# Altium PCB PCB1.pcbdoc
Units mil, origin at the board's own origin, x right, y up, seen from the top; angles counter-clockwise.
Board outline 5810 x 3220 mil, 2 copper layers (Top Layer, Bottom Layer); 108 components, 98 nets, 443 pads, 408 vias.
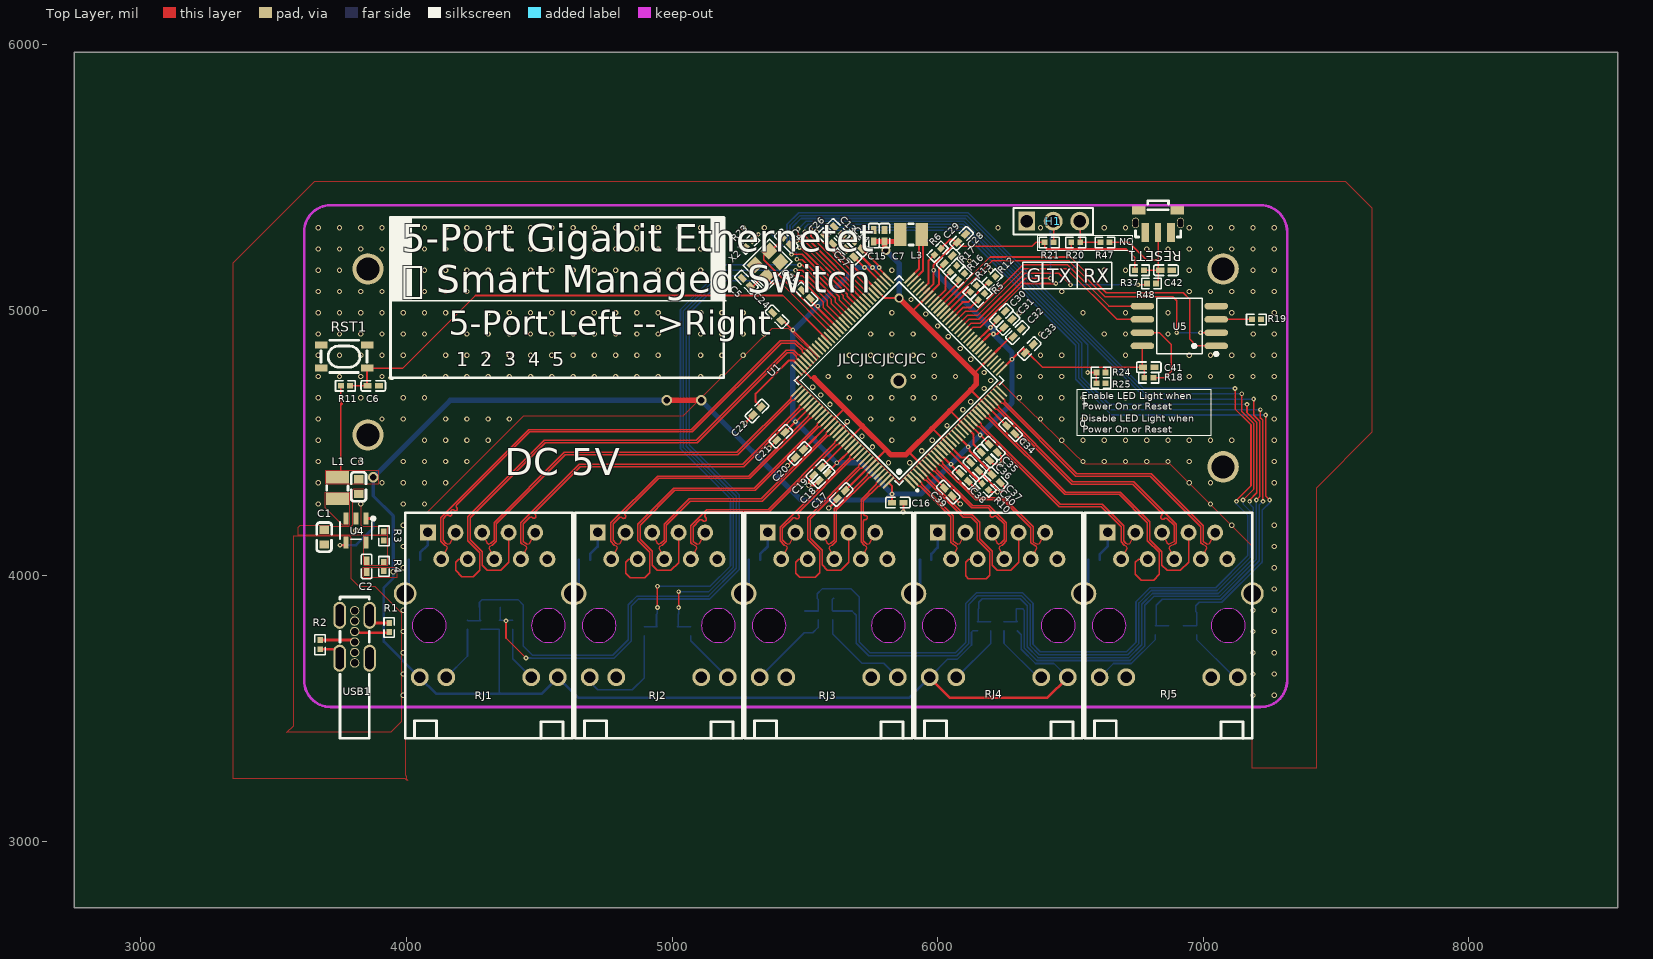
[diagram p0: Top Layer view]
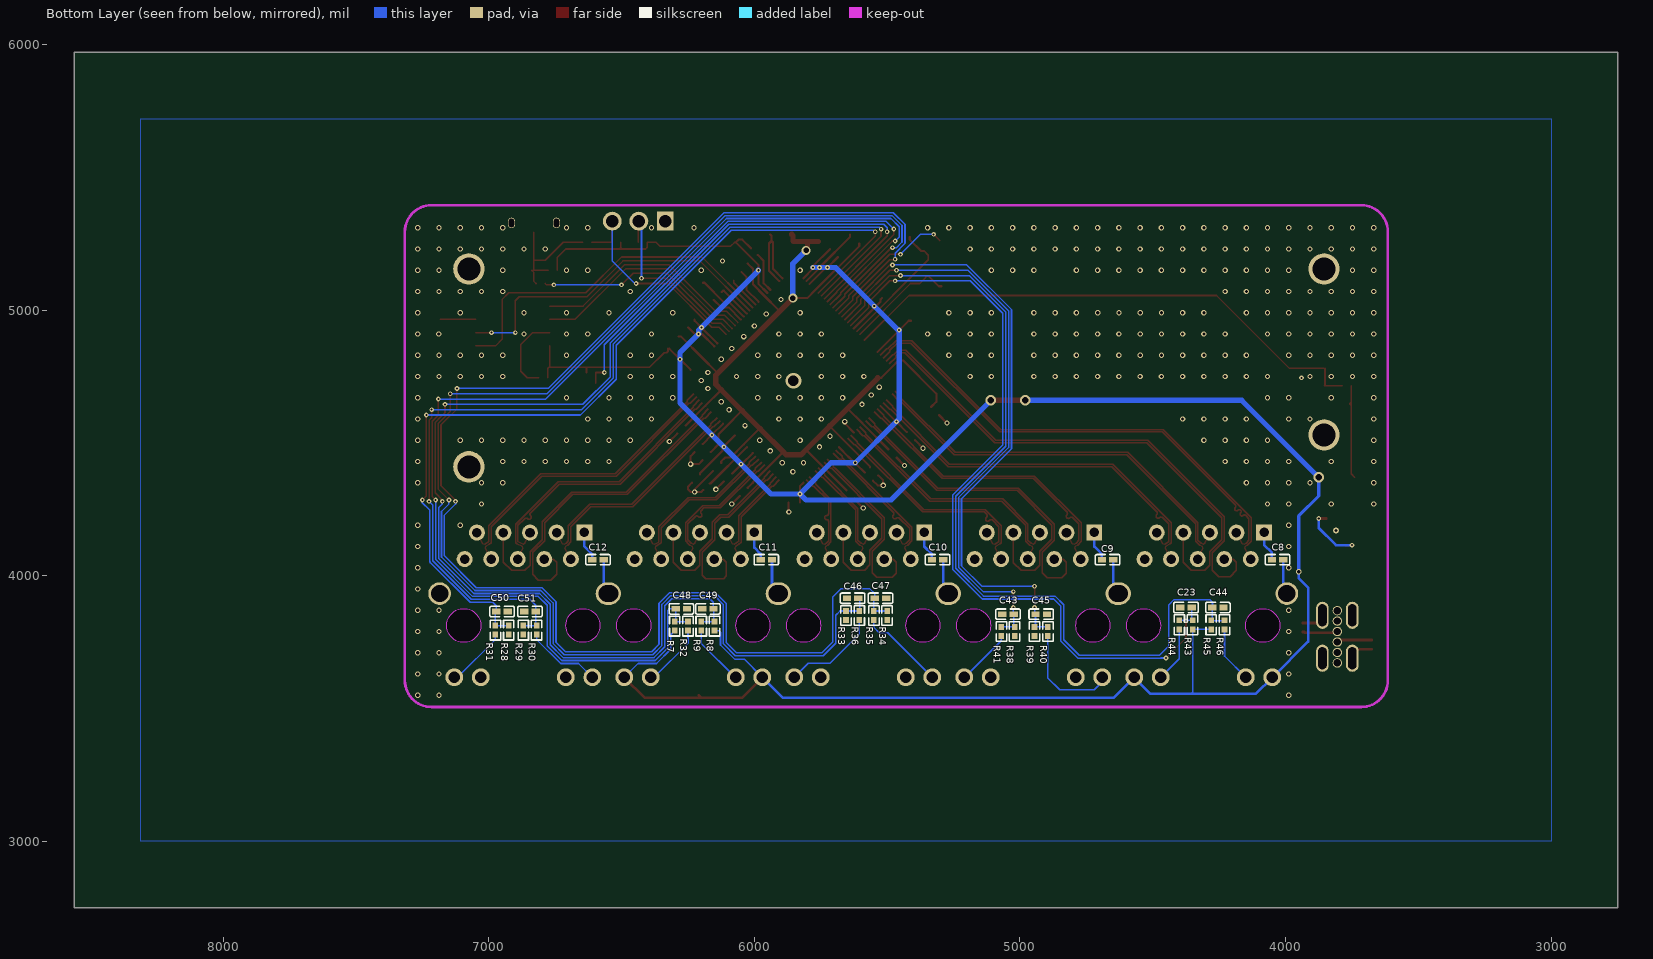
[diagram p1: Bottom Layer view, seen from below]

## Layer stack, top to bottom
Top Layer: signal copper (thickness not stored)
Dielectric: dielectric 12.6, FR-4, Dk 4.8
Bottom Layer: signal copper (thickness not stored)

## Board outline
8560,2750 2750,2750 2750,5970 8560,5970

## Components (designator, comment, footprint, x,y, rotation, side; value= is the part's Value field where it differs from the comment)
C1 "cc0603krx7r9bb104" c0603 3690,4145 r270 top
C2 "fn15x104k250png" c0402 3850,4035 r90 top
C3 "cc0603krx7r9bb104" c0603 3820,4335 r90 top
C4 "fn15x104k250png" c0402 5430,5260 r315 top
C5 "fn15x104k250png" c0402 5280,5105 r315 top
C6 "fn15x104k250png" c0402 3875,4715 r180 top
C7 "fn15x104k250png" c0402 5800,5280 r90 top
C8 "fn15x104k250png" c0402 4030,4060 r0 bottom
C9 "fn15x104k250png" c0402 4670,4060 r0 bottom
C10 "fn15x104k250png" c0402 5310,4060 r0 bottom
C11 "fn15x104k250png" c0402 5955,4060 r0 bottom
C12 "fn15x104k250png" c0402 6588.5,4060 r0 bottom
C13 "fn15x104k250png" c0402 5625.4,5299.2 r135 top
C14 "fn15x104k250png" c0402 5699.5,5245 r135 top
C15 "fn15x104k250png" c0402 5760,5280 r90 top
C16 "fn15x104k250png" c0402 5850,4275 r0 top
C17 "fn15x104k250png" c0402 5637.2,4305.3 r225 top
C18 "fn15x104k250png" c0402 5568.8,4373.1 r225 top
C19 "fn15x104k250png" c0402 5548.8,4393.1 r225 top
C20 "fn15x104k250png" c0402 5480,4460 r225 top
C21 "fn15x104k250png" c0402 5410,4525 r225 top
C22 "fn15x104k250png" c0402 5320,4620 r45 top
C23 "fn15x104k250png" c0402 4375,3880 r180 bottom
C24 "fn15x104k250png" c0402 5395,4975 r315 top
C25 "fn15x104k250png" c0402 5505,5060 r135 top
C26 "fn15x104k250png" c0402 5590,5265 r135 top
C27 "fn15x104k250png" c0402 5670,5215 r135 top
C28 "fn15x104k250png" c0402 6040,5190 r225 top
C29 "fn15x104k250png" c0402 6090,5270 r225 top
C30 "fn15x104k250png" c0402 6240,4980 r225 top
C31 "fn15x104k250png" c0402 6265,4950 r225 top
C32 "fn15x104k250png" c0402 6300,4915 r225 top
C33 "fn15x104k250png" c0402 6345,4855 r225 top
C34 "fn15x104k250png" c0402 6275,4550 r135 top
C35 "fn15x104k250png" c0402 6210,4480 r135 top
C36 "fn15x104k250png" c0402 6180,4450 r135 top
C37 "fn15x104k250png" c0402 6220,4365 r135 top
C38 "fn15x104k250png" c0402 6100,4370 r135 top
C39 "fn15x104k250png" c0402 6040,4315 r135 top
C40 "fn15x104k250png" c0402 6140,4410 r135 top
C41 "fn15x104k250png" c0402 6795,4785 r180 top
C42 "fn15x104k250png" c0402 6860,5150 r0 top
C43 "fn15x104k250png" c0402 5045,3855 r180 bottom
C44 "fn15x104k250png" c0402 4255,3880 r0 bottom
C45 "fn15x104k250png" c0402 4920,3855 r0 bottom
C46 "fn15x104k250png" c0402 5630,3915 r180 bottom
C47 "fn15x104k250png" c0402 5525,3915 r0 bottom
C48 "fn15x104k250png" c0402 6275,3875 r0 bottom
C49 "fn15x104k250png" c0402 6175,3875 r180 bottom
C50 "fn15x104k250png" c0402 6950,3865 r0 bottom
C51 "fn15x104k250png" c0402 6845,3865 r180 bottom
H1 "2.54-1*3p针" hdr-th_3p-p2.54-v-m-1 6435,5335 r0 top
L1 "252012cdmcdds-2r2mc" ind-smd_l2.5-w2.0 3740,4330 r270 top
L3 "hpi252010-2r2m" ind-smd_l2.5-w2.0 5900,5285 r0 top
R1 "tr0402d10k0q1025z" r0402 3935,3805 r270 top
R2 "tr0402d10k0q1025z" r0402 3675,3740 r90 top
R3 "tr0402d10k0q1025z" r0402 3915,4150 r90 top
R4 "tr0402d10k0q1025z" r0402 3915,4035 r90 top
R5 "tr0402d10k0q1025z" r0402 6165,5050 r225 top
R6 "tr0402d10k0q1025z" r0402 6000,5220 r225 top
R7 "tr0402d10k0q1025z" r0402 6300,3810 r270 bottom
R8 "tr0402d10k0q1025z" r0402 6150,3810 r270 bottom
R9 "tr0402d10k0q1025z" r0402 6200,3810 r270 bottom
R10 "tr0402d10k0q1025z" r0402 6180,4335 r135 top
R11 "tr0402d10k0q1025z" r0402 3770,4715 r180 top
R12 "tr0402d10k0q1025z" r0402 6205,5115 r225 top
R13 "tr0402d10k0q1025z" r0402 6135,5080 r225 top
R16 "tr0402d10k0q1025z" r0402 6090,5125 r225 top
R17 "tr0402d10k0q1025z" r0402 6060,5155 r225 top
R18 "tr0402d10k0q1025z" r0402 6795,4745 r180 top
R19 "tr0402d10k0q1025z" r0402 7200,4965 r180 top
R20 "tr0402d10k0q1025z" r0402 6520,5255 r0 top
R21 "tr0402d10k0q1025z" r0402 6420,5255 r180 top
R23 "tr0402d10k0q1025z" r0402 5290,5250 r225 top
R24 "tr0402d10k0q1025z" r0402 6615,4765 r0 top
R25 "tr0402d10k0q1025z" r0402 6615,4725 r0 top
R28 "tr0402d10k0q1025z" r0402 6925,3795 r270 bottom
R29 "tr0402d10k0q1025z" r0402 6870,3795 r270 bottom
R30 "tr0402d10k0q1025z" r0402 6820,3795 r270 bottom
R31 "tr0402d10k0q1025z" r0402 6975,3795 r90 bottom
R32 "tr0402d10k0q1025z" r0402 6250,3810 r90 bottom
R33 "tr0402d10k0q1025z" r0402 5655,3850 r270 bottom
R34 "tr0402d10k0q1025z" r0402 5500,3850 r270 bottom
R35 "tr0402d10k0q1025z" r0402 5550,3850 r270 bottom
R36 "tr0402d10k0q1025z" r0402 5605,3850 r90 bottom
R37 "tr0402d10k0q1025z" r0402 6760,5150 r0 top
R38 "tr0402d10k0q1025z" r0402 5020,3790 r270 bottom
R39 "tr0402d10k0q1025z" r0402 4945,3790 r270 bottom
R40 "tr0402d10k0q1025z" r0402 4895,3790 r270 bottom
R41 "tr0402d10k0q1025z" r0402 5070,3790 r90 bottom
R43 "tr0402d10k0q1025z" r0402 4350,3815 r270 bottom
R44 "tr0402d10k0q1025z" r0402 4400,3815 r90 bottom
R45 "tr0402d10k0q1025z" r0402 4280,3815 r270 bottom
R46 "tr0402d10k0q1025z" r0402 4230,3815 r270 bottom
R47 "tr0402d10k0q1025z" r0402 6630,5255 r180 top
R48 "tr0402d10k0q1025z" r0402 6805,5100 r0 top
RESET1 "st-1133" key-smd_st-1133 6830,5335 r180 top
RJ1 "hr911130a" rj45-th_hr911130a 4310,3890 r180 top
RJ2 "hr911130a" rj45-th_hr911130a 4950,3890 r180 top
RJ3 "hr911130a" rj45-th_hr911130a 5590,3890 r180 top
RJ4 "hr911130a" rj45-th_hr911130a 6230,3890 r180 top
RJ5 "hr911130a" rj45-th_hr911130a 6870,3890 r180 top
RST1 "k2-1808sn-a4sw-01" key-smd_4p-l4.2-w3.2-p2.20-ls5.1-tl 3765,4825 r180 top
U1 "rtl8367s-cg" lqfp-128_l14.0-w14.0-p0.40-ls16.0-bl 5855,4735 r45 top
U4 "sy8088iaac" sot-23-5_l3.0-w1.7-p0.95-ls2.8-bl 3810,4170 r180 top
U5 "w25q32jvssiq" soic-8_l5.3-w5.3-p1.27-ls8.0-bl 6910,4940 r90 top
USB1 "13" usb-type-c-th_918-518k2023d5000x 3805,3770 r0 top
X2 "7e25000e20ucg" crystal-smd_4p-l2.5-w2.0-bl 5360,5175 r45 top

## Footprints (in the part's own frame and the unit in brackets; to place one, negate y for a bottom-side part, rotate by r counter-clockwise, add the part's x,y. Pads: shape width x height; smd on the part's side, far side on the other; paste and mask are expansions set on the pad)
c0402 [mm]
  rect 0.79x0.54 smd: 1(-0.545,0) 2(0.545,0)
  silkscreen extent -1.17,-0.5 1.17,0.5
c0603 [mm]
  rect 0.8x0.9 smd: 1(-0.7,0) 2(0.7,0)
  silkscreen extent -1.41,-0.71 1.39,0.72
crystal-smd_4p-l2.5-w2.0-bl [mil]
  rect 47.2x43.3 smd: 1(-37.4,-29.5) 2(37.4,-29.5) 3(37.4,29.5) 4(-37.4,29.5)
  silkscreen extent -79,-69 70,60
hdr-th_3p-p2.54-v-m-1 [mil]
  rect 62x70.9 hole 47.2: 1(-100,0)
  round 70.9 hole 47.2: 2(0,0) 3(100,0)
  silkscreen extent -150,-50 150,50
ind-smd_l2.5-w2.0 [mil]
  rect 47.2x86.6 smd: 1(40.5,0) 2(-40.5,0)
  silkscreen extent -8,-40 8,40
key-smd_4p-l4.2-w3.2-p2.20-ls5.1-tl [mil]
  rect 47.2x25.6 smd: 1(-86.6,43.3) 2(86.6,43.3) 3(-86.6,-43.3) 4(86.6,-43.3)
  silkscreen extent -87,-61 87,60
key-smd_st-1133 [mil]
  oval 27.6x39.4 hole 19.7 slot 31.5 at 90 deg: 1(-84.6,6.9) 3(84.7,6.9)
  rect 51.2x35.4 smd: 1(-72.8,-42.3) 3(72.8,-42.3)
  rect 29.5x70.9 smd: 1(-48.2,42.3) 3(48.2,42.3)
  rect 23.6x70.9 smd: 2(0,42.3)
  silkscreen extent -85,-77 85,60
lqfp-128_l14.0-w14.0-p0.40-ls16.0-bl [mil]
  rect 7.9x57.5 smd: 1(-244.1,-300.4) 2(-228.3,-300.4) 3(-212.6,-300.4) 4(-196.8,-300.4) 5(-181.1,-300.4) 6(-165.3,-300.4) 7(-149.6,-300.4) 8(-133.9,-300.4) 9(-118.1,-300.4) 10(-102.4,-300.4) 11(-86.6,-300.4) 12(-70.9,-300.4) 13(-55.1,-300.4) 14(-39.4,-300.4) 15(-23.6,-300.4) 16(-7.9,-300.4) 17(7.9,-300.4) 18(23.6,-300.4) 19(39.4,-300.4) 20(55.1,-300.4) 21(70.9,-300.4) 22(86.6,-300.4) 23(102.4,-300.4) 24(118.1,-300.4) 25(133.9,-300.4) 26(149.6,-300.4) 27(165.4,-300.4) 28(181.1,-300.4) 29(196.9,-300.4) 30(212.6,-300.4) 31(228.4,-300.4) 32(244.1,-300.4) 65(244.1,300.4) 66(228.4,300.4) 67(212.6,300.4) 68(196.9,300.4) 69(181.1,300.4) 70(165.4,300.4) 71(149.6,300.4) 72(133.9,300.4) 73(118.1,300.4) 74(102.4,300.4) 75(86.6,300.4) 76(70.9,300.4) 77(55.1,300.4) 78(39.4,300.4) 79(23.6,300.4) 80(7.9,300.4) 81(-7.9,300.4) 82(-23.6,300.4) 83(-39.4,300.4) 84(-55.1,300.4) 85(-70.9,300.4) 86(-86.6,300.4) 87(-102.4,300.4) 88(-118.1,300.4) 89(-133.9,300.4) 90(-149.6,300.4) 91(-165.3,300.4) 92(-181.1,300.4) 93(-196.8,300.4) 94(-212.6,300.4) 95(-228.3,300.4) 96(-244.1,300.4)
  rect 57.5x7.9 smd: 33(300.4,-244.1) 34(300.4,-228.3) 35(300.4,-212.6) 36(300.4,-196.8) 37(300.4,-181.1) 38(300.4,-165.3) 39(300.4,-149.6) 40(300.4,-133.9) 41(300.4,-118.1) 42(300.4,-102.4) 43(300.4,-86.6) 44(300.4,-70.9) 45(300.4,-55.1) 46(300.4,-39.4) 47(300.4,-23.6) 48(300.4,-7.9) 49(300.4,7.9) 50(300.4,23.6) 51(300.4,39.4) 52(300.4,55.1) 53(300.4,70.9) 54(300.4,86.6) 55(300.4,102.4) 56(300.4,118.1) 57(300.4,133.9) 58(300.4,149.6) 59(300.4,165.4) 60(300.4,181.1) 61(300.4,196.9) 62(300.4,212.6) 63(300.4,228.4) 64(300.4,244.1) 97(-300.4,244.1) 98(-300.4,228.4) 99(-300.4,212.6) 100(-300.4,196.9) 101(-300.4,181.1) 102(-300.4,165.4) 103(-300.4,149.6) 104(-300.4,133.9) 105(-300.4,118.1) 106(-300.4,102.4) 107(-300.4,86.6) 108(-300.4,70.9) 109(-300.4,55.1) 110(-300.4,39.4) 111(-300.4,23.6) 112(-300.4,7.9) 113(-300.4,-7.9) 114(-300.4,-23.6) 115(-300.4,-39.4) 116(-300.4,-55.1) 117(-300.4,-70.9) 118(-300.4,-86.6) 119(-300.4,-102.4) 120(-300.4,-118.1) 121(-300.4,-133.9) 122(-300.4,-149.6) 123(-300.4,-165.3) 124(-300.4,-181.1) 125(-300.4,-196.8) 126(-300.4,-212.6) 127(-300.4,-228.3) 128(-300.4,-244.1)
  silkscreen extent -279,-345 279,279
r0402 [mm]
  rect 0.566x0.54 smd: 1(-0.433,0) 2(0.433,0)
  silkscreen extent -0.94,-0.5 0.94,0.5
rj45-th_hr911130a [mil]
  round 66.93 hole 43.31: 11(260,272.62) 12(160,272.62) 13(-160,272.62) 14(-260,272.62)
  rect 60x60 hole 35.83: P1(229.63,-272.62)
  round 60 hole 35.83: P2(179.1,-172.38) P3(125.2,-272.38) P4(79.1,-172.38) P5(25.2,-272.38) P6(-20.9,-172.38) P7(-74.8,-272.38) P8(-120.9,-172.38) P9(-174.8,-272.38) P10(-220.9,-172.38)
  round 85 hole 65: SHIELD0(-315,-42.48) SHIELD1(315,-42.48)
  Multi-Layer board cut-out: -288.38,77.62 -282.04,49.86 -264.29,27.6 -238.63,15.25 -210.16,15.25 -184.51,27.6 -166.76,49.86 -160.42,77.62 -160.42,77.62 -166.76,105.38 -184.51,127.64 -210.16,139.99 -238.63,139.99 -264.29,127.64 -282.04,105.38 -288.38,77.62
  Multi-Layer board cut-out: 160.42,77.62 166.76,49.86 184.51,27.6 210.17,15.25 238.64,15.25 264.29,27.6 282.04,49.86 288.38,77.62 288.38,77.62 282.04,105.38 264.29,127.64 238.64,139.99 210.17,139.99 184.51,127.64 166.76,105.38 160.42,77.62
  Multi-Layer keep-out region: -288.38,77.62 -282.04,49.86 -264.29,27.6 -238.63,15.25 -210.16,15.25 -184.51,27.6 -166.76,49.86 -160.42,77.62 -160.42,77.62 -166.76,105.38 -184.51,127.64 -210.16,139.99 -238.63,139.99 -264.29,127.64 -282.04,105.38 -288.38,77.62
  Multi-Layer keep-out region: 160.42,77.62 166.76,49.86 184.51,27.6 210.17,15.25 238.64,15.25 264.29,27.6 282.04,49.86 288.38,77.62 288.38,77.62 282.04,105.38 264.29,127.64 238.64,139.99 210.17,139.99 184.51,127.64 166.76,105.38 160.42,77.62
  silkscreen extent -315,-347 315,503
soic-8_l5.3-w5.3-p1.27-ls8.0-bl [mm]
  oval 0.63x2.25 smd: 1(-1.905,-3.53) 2(-0.635,-3.53) 3(0.635,-3.53) 4(1.905,-3.53) 5(1.905,3.53) 6(0.635,3.53) 7(-0.635,3.53) 8(-1.905,3.53)
  silkscreen extent -2.82,-3.68 2.64,2.18
sot-23-5_l3.0-w1.7-p0.95-ls2.8-bl [mm]
  rect 0.49x1.157 smd: 1(-0.95,-1.154) 2(0,-1.154) 3(0.95,-1.154)
  rect 0.49x1.175 smd: 4(0.95,1.154) 5(-0.95,1.154)
  silkscreen extent -1.8,-1.29 1.53,0.85
usb-type-c-th_918-518k2023d5000x [mil]
  oval 47.2x102.4 hole 31.5 slot 82.7 at 90 deg: 7(-56.3,-80.7) 7(-56.3,80.7) 7(56.3,-80.7) 7(56.3,80.7)
  round 35.4 hole 27.6: A5(0,-19.7) A9(0,59.1) A12(0,98.4) B5(0,19.7) B9(0,-59.1) B12(0,-98.4)
  silkscreen extent -55,-382 55,150

## Free pads (board coordinates)
  round 118.11 hole 86.61: 1(7075,5155) 2(3855,5155) 3(3855,4530) 4(7075,4410)

## Via types
v1: diameter 20, hole 12, Top Layer to Bottom Layer, 345 vias
v2: diameter 17.7, hole 7.9, Top Layer to Bottom Layer, 56 vias
v3: diameter 40, hole 24, Top Layer to Bottom Layer, 3 vias
v4: diameter 34, hole 20, Top Layer to Bottom Layer, 2 vias
v5: diameter 60, hole 40, Top Layer to Bottom Layer, 1 vias
v6: diameter 24.02, hole 12.01, Top Layer to Bottom Layer, 1 vias

## Nets (pads, with @x,y where several pads share a name; then routed paths per layer and width w, separated by ;. In a path a pad name is that pad's centre, name@x,y a point inside that pad or via, vN(x,y) a via of type N, cw(c..) or ccw(c..) an arc to the next point about the centre after c; other vN are vias at no path point)
1V1: C7.1 C15.1 C17.1 C19.1 C20.1 C22.2 C26.1 C28.2 C32.2 C34.2 C36.2 C39.2 C40.2 L3.2 U1.6 U1.14 U1.20 U1.27 U1.37 U1.58 U1.69 U1.95 U1.108 U1.114 U1.122 | length 4193.5
  Top Layer w7.9: C22.2 5334.8,4635.2 5315,4655 5315,4685 5440,4810 5457.14,4810 U1.95 5522.14,4745 5535,4745 ; C20.1 5592.45,4572.45 U1.108 5649.85,4630.12 ; C19.1 5564,4410.63 U1.114 5715.82,4562.44 5715.82,4564.18 ; C26.1 5605.2,5240.91 U1.69 5801.11,5045 v4@5845,5045 ; C17.1 5748.37,4416.47 U1.122 5805.67,4474.1 5805.9,4474.1 ; 5890.8,4465.8 5890.8,4465.43 U1.6 6005,4351.23 6005,4350 6006.23,4350 6024.8,4331.43 C39.2 ; 5910.09,5001.65 U1.58 6005,5096.57 6005,5155 C28.2 ; 5978.3,4553.3 5980.98,4553.3 U1.14 6089.28,4445 6110,4445 6124.8,4430.2 C40.2 ; 6045.86,4620.86 6047.06,4620.86 U1.20 6135,4532.92 6135,4495 C36.2 ; 6125.03,4700.03 6125.03,4698.88 U1.27 6258.71,4565.2 C34.2 ; 6143.47,4767.35 U1.37 6275.91,4899.8 C32.2
  Top Layer w20: 5535,4745 5715.82,4564.18 5805.9,4474.1 5825,4455 5880,4455 5890.8,4465.8 5978.3,4553.3 6045.86,4620.86 6125.03,4700.03 6145,4720 6145,4755 v4(5855,5045) ; C15.1 C7.1 ; v4(5805,5225) 5800,5230 C7.1 ; L3.2 5854.5,5280 5854.5,5260 5853,5258.5 C7.1
  Bottom Layer w20: v4(5805,5225) 5855,5175 v4(5855,5045)
3V3: C2.1 C3.2 C13.1 C14.1 C16.1 C18.1 C21.1 C24.2 C25.1 C27.1 C29.2 C30.2 C31.2 C33.2 C35.2 C37.2 C38.2 C41.2 L1.2 R4.1 R6.1 R7.2 R8.2 R11.2 R18.2 R20.1 R21.2 R24.2 R37.1 R43.2 R45.2 RJ1.11 RJ1.14 RJ4.11 RJ4.14 U1.11 U1.17 U1.21 U1.33 U1.41 U1.42 U1.59 U1.65 U1.66 U1.67 U1.82 U1.90 U1.102 U1.116 U1.128 U5.8 | length 13324.9
  Top Layer w6: L1.2 3752.96,4383.46 3752.96,4641.15 ; R11.2 3752.96,4653.19 ; C29.2@6075.2,5254.8 6090,5240 6355,5240 6370,5255 R21.2 6402.96,5237.04 6410,5230 6497.23,5230 ; C33.2 6339.77,4839.83 6394.59,4785 6627.04,4785 ; R20.1 6502.96,5235.73 ; R24.2 6632.04,4780 ; R37.1 6742.96,5197.04 6710,5230 6508.69,5230 ; U5.8 6771,4787.5 C41.2 ; R18.2 6777.96,4780.54 C41.2 ; 3752.96,4641.15 3758.98,4647.17 ; 3752.96,4641.15 3752.96,4647.17 ; 3752.96,4647.17 3758.98,4647.17 ; 3752.96,4647.17 3752.96,4653.19 ; 3752.96,4653.19 3758.98,4647.17 ; 6497.23,5230 6502.96,5235.73 ; 6497.23,5230 6502.96,5230 ; 6502.96,5230 6502.96,5235.73 ; 6502.96,5230 6508.69,5230 ; 6502.96,5235.73 6508.69,5230 ; 6627.04,4785 6632.04,4780 ; 6627.04,4785 6632.04,4785 ; 6632.04,4780 6632.04,4785 ; 6632.04,4780 6637.04,4785 ; 6632.04,4785 6637.04,4785 ; 6637.04,4785 C41.2
  Top Layer w7.9: C24.2 5418.64,4959.8 v2@5455,4923.43 ; C21.1 5426.29,4540.2 5465,4578.91 v2(5465,4580) 5466.09,4580 U1.102 ; v2(5455,4925) v2@5455,4923.43 ; C25.1 5525.2,5039.8 5525.2,5031.42 U1.82 ; U1.90 v2@5455,4923.43 ; C18.1 5646.11,4448.19 ; v2(5620,4425) 5622.92,4425 5645,4447.08 ; C13.1 5640.2,5283.6 5640.2,5274.8 v2@5749,5166 ; 5645,4445.03 5645,4447.08 ; U1.116 5646.11,4448.19 ; C27.1 v2(5725,5160) 5730.66,5160 U1.67 ; v2@5750,5163.01 U1.66 ; U1.128 5828.5,4336.67 v2(5828.5,4307.69) C16.1 ; U1.65 5780,5155.21 5780,5164.5 C14.1@5715,5229.5 ; U1.59 5985,5098.91 v2(5985,5150) 5985,5170 C29.2@6069.8,5254.8 ; U1.11 v2@6045,4422.53 ; R6.1 6045,5265 6060,5265 6069.8,5255.2 C29.2@6069.8,5254.8 ; U1.17 6120,4481.17 6120,4470 6204.8,4385.2 C37.2 ; C29.2@6075.2,5254.8 C29.2@6069.8,5254.8 ; C38.2 6082.33,4385.2 v2@6048.76,4418.76 ; U1.21 v2(6160,4530) ; U1.42 v2(6199.36,4934.54) 6224.8,4959.98 C30.2 ; U1.41 6197.02,4910 v2(6210,4910) 6225,4910 C31.2 ; v2@6160,4530.27 v2(6160,4530) ; C35.2 6194.8,4495.47 6160.27,4530 v2(6160,4530) ; U1.33 6280,4814.79 v2(6280,4815) 6280.21,4815 6320.01,4854.8 ; 6324.8,4854.8 6324.8,4844.85 C33.2 ; 5645,4447.08 5646.11,4448.19 ; C14.1 5714.7,5229.6 5714.8,5229.5 C14.1@5715,5229.5 ; C14.1 5715.2,5229.5 C14.1@5715,5229.5 ; C14.1 C14.1@5715,5229.5 ; v2@5749,5166 v2@5753.01,5160 ; v2@5749,5166 v2@5751,5164 ; v2@5751,5164 v2@5753.01,5160 ; v2@5751,5164 v2(5755,5160) v2@5753.01,5160 ; v2@6045,4422.53 6047.47,4422.53 v2@6048.76,4418.76 ; v2@6045,4422.53 v2@6048.76,4418.76
  Top Layer w10: RJ4.11 6047.38,3540 6200,3540 ; 6210,3550 6200,3540 ; RJ4.14 6412.62,3540 6200,3540
  Top Layer w20: v3(4980,4660) v3(5110,4660)
  Bottom Layer w6: R45.2 R43.2 4350,3560.94 ; 4344.06,3555 4350,3560.94 ; 4350.12,3555 4350,3555.12 4350,3560.94 ; 4355.94,3555 4350,3560.94 ; RJ4.11 6038.62,3686 6074.44,3686 6127.52,3739.09 6127.52,3787.52 6132.96,3792.96 R8.2 ; R7.2 6314.96,3778 6314.96,3723.06 6368.56,3669.46 6437.92,3669.46 RJ4.14
  Bottom Layer w10: v1(3950,4015) 3950,3990 3915,3955 3915,3752.38 RJ1.11 4112.38,3555 4344.06,3555 4350.12,3555 4355.94,3555 4507.62,3555 RJ1.14 4647.38,3540 5892.62,3540 RJ4.11
  Bottom Layer w12: v3(3875,4370) 3875,4300 3950,4225 v1(3950,4015)
  Bottom Layer w20: v3(3875,4370) 4165,4660 v3(4980,4660) ; v3(5110,4660) 5485,4285 5805.81,4285 v2(5828.5,4307.69) ; v2(5780,5160) v2(5755,5160) v2(5725,5160) 5694.1,5160 v2(5548.8,5014.7) 5459.1,4925 v2(5455,4925) 5455,4590 v2(5465,4580) v2(5620,4425) 5711.19,4425 v2(5828.5,4307.69) ; v2(5985,5150) 5985,5148.9 v2(6199.36,4934.54) 6210,4923.9 v2(6210,4910) 6280,4840 v2(6280,4815) 6280,4650 v2(6160,4530) v2(6115,4485) v2(6050,4420) 5937.69,4307.69 v2(5828.5,4307.69)
$1N5419: L1.1 U4.3
$1N5420: C2.2 R3.1 R4.2 U4.5
$1N8196: R1.2 USB1.B5 | length 133.2
  Top Layer w10: USB1.B5 3815.3,3789.7 3820,3785 3927.04,3785 3930,3787.96 R1.2
$1N8209: R2.2 USB1.A5 | length 133.6
  Top Layer w10: R2.2 3675.92,3757.96 3797.34,3757.96 USB1.A5
$1N10548: R5.2 U1.50 | length 132.8
  Top Layer w7.9: U1.50 6096.62,5010 6125,5010 R5.2
$1N11208: R6.2 U1.60 | length 152.6
  Top Layer w7.9: U1.60 5965,5101.11 5965,5185 R6.2
$1N14909: R10.2 U1.13 | length 196.1
  Top Layer w7.9: U1.13 6165.03,4347.05 R10.2
$1N15365: C6.2 R11.1 RST1.1 U1.86 | length 2046.8
  Top Layer w6: R11.1 C6.2 3851.6,4716.9 RST1.1 ; RST1.1@3856.6,4781.7 3986.7,4781.7 4260,5055 5417.53,5055 U1.86@5586.35,4886.18
$1N15851: L3.1 U1.63 U1.64 | length 355.1
  Top Layer w7.9: U1.64 5930,5155.21 5930,5254.5 L3.1@5935.5,5260 ; U1.63 5945,5148.01 5945,5250.5 L3.1@5935.5,5260 ; L3.1 5935.5,5280 L3.1@5935.5,5260
$1N16314: C8.2 RJ1.P1 | length 114.6
  Bottom Layer w10: C8.2 4051.5,4086.5 4080.37,4115.37 RJ1.P1
$1N16437: C9.2 RJ2.P1 | length 114.6
  Bottom Layer w10: C9.2 4691.5,4081.5 4720,4110 4720,4162.25 RJ2.P1
$1N16560: C10.2 RJ3.P1 | length 114.6
  Bottom Layer w10: C10.2 5331.5,4081.5 5360.37,4110.37 RJ3.P1
$1N16683: C11.2 RJ4.P1 | length 112.5
  Bottom Layer w10: C11.2 5976.5,4081.5 6000.37,4105.37 RJ4.P1
$1N16806: C12.2 RJ5.P1 | length 115.2
  Bottom Layer w10: C12.2 6610,4080 6640.37,4110.37 RJ5.P1
$1N31077: R12.2 U1.51 | length 206.3
  Top Layer w7.9: U1.51 6094.28,5030 6115,5030 6187.95,5102.95 R12.2
$1N31108: R13.2 U1.52 | length 129.5
  Top Layer w7.9: U1.52 R13.2@6115.03,5072.95 ; R13.2@6117.95,5072.95 R13.2
$1N31201: R16.2 U1.55 | length 127.5
  Top Layer w6: U1.55 6077.95,5102.77 R16.2
$1N31232: R17.2 U1.56 | length 138.6
  Top Layer w7.9: U1.56 6030,5077.02 6030,5125 R17.2
$1N32914: R18.1 U5.7 | length 306
  Top Layer w6: U5.7 6835,4915 6880,4870 6880,4770 6855,4745 R18.1
$1N34449: R19.2 U5.3 | length 134
  Top Layer w6: U5.3 R19.2
$1N57246: R46.2 RJ1.12 | length 213.7
  Bottom Layer w6: RJ1.12 4230,3697.38 R46.2
$1N58694: R44.1 RJ1.13 | length 209.6
  Bottom Layer w6: R44.1 4400,3687.38 RJ1.13
$1N64288: R41.1 RJ2.14 | length 215
  Bottom Layer w6: R41.1 5070,3755 5207.62,3617.38 RJ2.14
$1N66730: R40.2 RJ2.11 | length 411.4
  Bottom Layer w6: RJ2.11 4690,3600 4720,3570 4850,3570 4895,3615 R40.2
$1N68404: R35.2 RJ3.11 | length 325.7
  Bottom Layer w6: RJ3.11 5497.62,3785 5530,3785 5550,3805 R35.2
$1N69259: R36.1 RJ3.14 | length 365.3
  Bottom Layer w6: R36.1 5605,3780 5715,3670 5797.38,3670 RJ3.14
$1N70886: R9.2 RJ4.12 | length 230.8
  Bottom Layer w6: RJ4.12 6072.38,3617.38 6200,3745 R9.2
$1N72981: R32.1 RJ4.13 | length 240.8
  Bottom Layer w6: R32.1 6250,3745 6377.62,3617.38 RJ4.13
$1N74126: R30.2 RJ5.11 | length 287
  Bottom Layer w6: RJ5.11 6662.08,3669.46 6729.46,3669.46 6820,3760 R30.2
$1N74128: R31.1 RJ5.14 | length 232
  Bottom Layer w6: R31.1 6975,3760 7117.62,3617.38 RJ5.14
DL: R23.1 U1.76 | length 524.9
  Top Layer w6: R23.1 v2(5325,5285) ; v2(5450,5210) 5490,5210 5645,5055 5645,5045.27 U1.76
  Bottom Layer w6: v2(5325,5285) 5375,5285 v2(5450,5210)
EN_PL: R24.1 R25.1 U1.73 | length 1849.8
  Top Layer w6: v2(5475,5305) 5475,5285 5690,5070 5690,5067.02 U1.73 ; v2(6565,4765) R24.1 R25.1
  Bottom Layer w6: v2(5475,5305) 5503.85,5333.85 6100.58,5333.85 6565,4869.43 v2(6565,4765)
GND: C1.1 C3.1 C4.2 C5.1 C6.1 C7.2 C8.1 C9.1 C10.1 C11.1 C12.1 C13.2 C14.2 C15.2 C16.2 C17.2 C18.2 C19.2 C20.2 C21.2 C22.1 C23.1 C24.1 C25.2 C26.2 C27.2 C28.1 C29.1 C30.1 C31.1 C32.1 C33.1 C34.1 C35.1 C36.1 C37.1 C38.1 C39.1 C40.1 C41.1 C42.2 C43.1 C44.1 C45.1 C46.1 C47.1 C48.1 C49.1 C50.1 C51.1 H1.1 pad.1 pad.2 pad.3 pad.4 R1.1 R2.1 R3.2 R5.1 R10.1 R12.1 R13.1 R16.1 R17.1 R19.1 R23.2 R25.2 R28.2 R29.2 R33.2 R34.2 R38.2 R39.2 RESET1.1 RESET1.3 RJ1.P10 RJ1.SHIELD0 RJ1.SHIELD1 RJ2.12 RJ2.13 RJ2.P10 RJ2.SHIELD0 RJ2.SHIELD1 RJ3.12 RJ3.13 RJ3.P10 RJ3.SHIELD0 RJ3.SHIELD1 RJ4.P10 RJ4.SHIELD0 RJ4.SHIELD1 RJ5.12 RJ5.13 RJ5.P10 RJ5.SHIELD0 RJ5.SHIELD1 RST1.3 U1.1 U1.12 U1.18 U1.24 U1.32 U1.34 U1.40 U1.43 U1.44 U1.57 U1.61 U1.62 U1.68 U1.85 U1.89 U1.96 U1.99 U1.105 U1.111 U1.115 U1.119 U1.125 U4.2 U5.4 USB1.7 USB1.A12 USB1.B12 X2.2 X2.4 | length 1666.9
  Top Layer w7.9: v1(5275,4575) C22.1 ; v1(5365,4480) C21.2 ; v1(5435,4415) C20.2 ; C19.2 5515,4359.3 v1(5515,4340) 5535.7,4340 C18.2 ; v1(5590,4255) 5622,4287 C17.2 ; U1.111 5660,4573.38 v1(5660,4580) ; v1(5870,4240) 5871.5,4241.5 C16.2 ; C39.1 v1(6085,4270) ; C38.1 v1(6145,4325) ; C40.1 6225,4325 v1(6225,4315) ; R10.1 6200,4315 v1(6225,4315) ; C36.1 6210,4420 v1(6240,4420) 6240,4450 C35.1 ; C37.1 6250,4335 6250,4325 6240,4315 v1(6225,4315) ; C34.1 v1(6320,4505)
  Top Layer w10: R2.1 3748.7,3722.96 USB1.7@3748.7,3689.3 ; USB1.7@3861.3,3850.7 3861.3,3822.04 R1.1
  Bottom Layer w10: RJ1.SHIELD1 4008.5,3945.98 C8.1 ; RJ2.SHIELD1 4648.5,3945.98 C9.1 ; RJ3.SHIELD1 5288.5,3945.98 C10.1 ; RJ4.SHIELD1 5933.5,3950.98 C11.1 ; RJ5.SHIELD1 6567,3944.48 C12.1
  other v1: 3987.63,3549.79 7187.63,3549.79 7267.63,3549.79 3987.63,3629.79 7187.63,3629.79 7267.63,3629.79 3987.63,3709.79 7187.63,3709.79 7267.63,3709.79 3987.63,3789.79 7187.63,3789.79 7267.63,3789.79 3987.63,3869.79 7187.63,3869.79 7267.63,3869.79 7267.63,3949.79 3987.63,4029.79 7267.63,4029.79 3987.63,4109.79 7267.63,4109.79 3987.63,4189.79 7107.63,4189.79 7267.63,4189.79 3667.63,4269.79 3827.63,4269.79 3987.63,4269.79 4067.63,4269.79 7027.63,4269.79 3667.63,4349.79 3907.63,4349.79 3987.63,4349.79 4067.63,4349.79 4147.63,4349.79 6947.63,4349.79 7027.63,4349.79 7267.63,4349.79 5855,4391.35 5815,4425 5895,4425 3667.63,4429.79 3827.63,4429.79 3987.63,4429.79 4067.63,4429.79 4147.63,4429.79 4227.63,4429.79 6547.63,4429.79 6627.63,4429.79 6707.63,4429.79 6787.63,4429.79 6867.63,4429.79 6947.63,4429.79 7267.63,4429.79 5940,4470 5755,4485 3667.63,4509.79 4067.63,4509.79 4147.63,4509.79 4227.63,4509.79 4307.63,4509.79 5827.63,4509.79 5980,4510 6467.63,4509.79 6547.63,4509.79 6627.63,4509.79 6707.63,4509.79 6787.63,4509.79 6867.63,4509.79 6947.63,4509.79 7027.63,4509.79 7107.63,4509.79 7267.63,4509.79 5715,4525 6035,4565 3667.63,4589.79 3907.63,4589.79 3987.63,4589.79 4147.63,4589.79 4227.63,4589.79 4307.63,4589.79 4387.63,4589.79 5747.63,4589.79 5827.63,4589.79 5907.63,4589.79 6387.63,4589.79 6467.63,4589.79 6547.63,4589.79 6627.63,4589.79 7267.63,4589.79 6095,4625 5595,4645 6125,4655 3667.63,4669.79 3827.63,4669.79 3987.63,4669.79 4067.63,4669.79 5667.63,4669.79 5747.63,4669.79 5827.63,4669.79 5907.63,4669.79 5987.63,4669.79 6307.63,4669.79 6387.63,4669.79 6467.63,4669.79 6547.63,4669.79 6707.63,4669.79 7267.63,4669.79 5560,4680 6175,4705 5530,4710 6200,4735 3667.63,4749.79 3747.63,4749.79 3827.63,4749.79 3907.63,4749.79 4067.63,4749.79 4147.63,4749.79 4227.63,4749.79 4307.63,4749.79 4387.63,4749.79 4467.63,4749.79 4547.63,4749.79 4627.63,4749.79 4707.63,4749.79 4787.63,4749.79 4867.63,4749.79 4947.63,4749.79 5107.63,4749.79 5187.63,4749.79 5587.63,4749.79 5667.63,4749.79 5747.63,4749.79 5907.63,4749.79 5987.63,4749.79 6067.63,4749.79 6307.63,4749.79 6387.63,4749.79 6467.63,4749.79 6947.63,4749.79 7027.63,4749.79 7107.63,4749.79 7187.63,4749.79 7267.63,4749.79 6175,4765 6125,4815 3667.63,4829.79 3747.63,4829.79 3827.63,4829.79 3907.63,4829.79 3987.63,4829.79 4147.63,4829.79 4227.63,4829.79 4307.63,4829.79 4387.63,4829.79 4467.4,4829.9 4547.4,4829.9 4627.63,4829.79 4707.63,4829.79 4787.63,4829.79 4867.63,4829.79 4947.63,4829.79 5107.63,4829.79 5187.63,4829.79 5267.63,4829.79 5667.63,4829.79 5747.63,4829.79 5827.63,4829.79 5907.63,4829.79 5987.63,4829.79 6387.63,4829.79 6467.63,4829.79 6707.63,4829.79 6947.63,4829.79 7027.63,4829.79 7107.63,4829.79 7187.63,4829.79 7267.63,4829.79 6085,4855 6040,4900 3667.63,4909.79 3747.63,4909.79 3827.63,4909.79 3907.63,4909.79 3987.63,4909.79 4067.63,4909.79 4227.63,4909.79 4307.63,4909.79 4387.63,4909.79 4467.4,4909.9 4547.4,4909.9 4627.63,4909.79 4707.63,4909.79 4787.63,4909.79 4867.63,4909.79 4947.63,4909.79 5107.63,4909.79 5187.63,4909.79 5267.63,4909.79 5347.63,4909.79 5747.63,4909.79 5827.63,4909.79 5907.63,4909.79 6387.63,4909.79 6627.63,4909.79 6707.63,4909.79 6867.63,4909.79 7188.4,4909.8 7267.63,4909.79 6000,4940 5955,4985 3667.63,4989.79 3747.63,4989.79 3827.63,4989.79 3907.63,4989.79 3987.63,4989.79 4067.63,4989.79 4147.63,4989.79 4307.63,4989.79 4387.63,4989.79 4467.4,4989.9 4547.4,4989.9 4627.4,4989.9 4707.4,4989.9 4787.63,4989.79 4867.63,4989.79 4947.63,4989.79 5107.63,4989.79 5187.63,4989.79 5267.63,4989.79 5827.63,4989.79 6307.63,4989.79 6547.63,4989.79 6707.63,4989.79 6867.63,4989.79 7107.63,4989.79 7267.63,4989.79 5900,5040 3667.63,5069.79 3747.63,5069.79 3827.63,5069.79 3907.63,5069.79 3987.63,5069.79 4067.63,5069.79 4147.63,5069.79 4227.63,5069.79 6467.63,5069.79 6947.63,5069.79 7027.63,5069.79 7107.63,5069.79 7187.63,5069.79 7267.63,5069.79 3667.63,5149.79 3747.63,5149.79 3987.63,5149.79 4067.63,5149.79 4147.63,5149.79 4227.63,5149.79 4307.63,5149.79 4387.63,5149.79 4467.5,5150 4547.5,5150 4627.63,5149.79 4707.63,5149.79 4787.63,5149.79 4947.63,5149.79 5027.63,5149.79 5107.63,5149.79 5827.63,5149.79 6200,5150 6627.63,5149.79 6707.63,5149.79 6947.63,5149.79 7187.63,5149.79 7267.63,5149.79 6120,5185 3667.63,5229.79 3747.63,5229.79 3827.63,5229.79 3907.63,5229.79 3987.63,5229.79 4067.63,5229.79 4147.63,5229.79 4227.63,5229.79 4307.63,5229.79 4387.63,5229.79 4467.63,5229.79 4547.63,5229.79 4627.63,5229.79 4707.63,5229.79 4787.63,5229.79 4867.63,5229.79 4947.63,5229.79 5027.63,5229.79 5107.63,5229.79 5187.63,5229.79 6787.63,5229.79 6867.63,5229.79 6947.63,5229.79 7027.63,5229.79 7107.63,5229.79 7187.63,5229.79 7267.63,5229.79 3667.63,5309.79 3747.63,5309.79 3827.63,5309.79 3907.63,5309.79 3987.63,5309.79 4067.63,5309.79 4147.63,5309.79 4227.63,5309.79 4307.63,5309.79 4387.63,5309.79 4467.63,5309.79 4547.63,5309.79 4627.63,5309.79 4707.63,5309.79 4787.63,5309.79 4867.63,5309.79 4947.63,5309.79 5027.63,5309.79 5107.63,5309.79 5187.63,5309.79 5267.63,5309.79 5347.63,5309.79 6227.63,5309.79 6387.63,5309.79 6627.63,5309.79 6707.63,5309.79 6947.63,5309.79 7027.63,5309.79 7107.63,5309.79 7187.63,5309.79 7267.63,5309.79
  other v2: 3940,4745
  other v5: 5853.1,4733.8
  other v6: 3810,4170
P0_LED0: C23.2 R43.1 R44.2 U1.81 | length 3038.7
  Top Layer w6: v2(4375,3830) 4375,3765 v2(4450,3690) ; v2(5470,5110) 5490,5110 5570,5030 5570,5008.83 U1.81
  Bottom Layer w6: C23.2 4353.5,3835.54 R43.1 4372.96,3832.04 v2(4375,3830) 4377.04,3832.04 R44.2 ; v2(4450,3690) 4469.43,3690 4470.44,3688.99 4781.13,3688.99 4846.51,3754.37 4846.51,3885.94 4872.71,3912.14 5142.14,3912.14 5253.03,4023.03 5253.03,4303.68 5065,4491.71 5065,4988.29 5186.71,5110 v2(5470,5110)
P0_LED1: C44.2 R45.1 R46.1 U1.80 | length 3261.5
  Top Layer w6: v2(5450,5130) 5490,5130 5585,5035 5585,5016.17 U1.80
  Bottom Layer w6: R46.1 4231.5,3830.54 R45.1@4276.5,3830.54 ; R45.1 4278.5,3830.54 R45.1@4276.5,3830.54 ; v2(5450,5130) 5191.14,5130 5053.99,4992.85 5053.99,4487.15 5242.02,4299.12 5242.02,4027.59 5137.58,3923.15 4868.15,3923.15 4835.5,3890.5 4835.5,3758.93 4776.56,3700 4475,3700 4440,3735 4440,3890 4420,3910 4285,3910 4275,3900 4275,3881.5 C44.2 R45.1@4276.5,3830.54
P0MDIAN: RJ1.P3 U1.92 | length 1867.5
  Top Layer w5: RJ1.P3 4162.5,4121.01 4155.32,4118.86 4148.71,4122.42 4138.07,4133.07 4138.07,4215 4149.65,4226.58 cw(c4154.6,4221.63) 4159.55,4226.58 ccw(c4164.5,4231.53) 4169.45,4226.58 ccw(c4164.5,4231.53) 4169.45,4236.48 cw(c4174.4,4241.43) 4169.45,4246.38 cw(c4174.4,4241.43) 4179.35,4246.38 ccw(c4184.3,4251.33) 4189.25,4246.38 ccw(c4184.3,4251.33) 4189.25,4256.28 cw(c4194.2,4261.23) 4189.25,4266.18 4464.07,4541 5076,4541 5411,4876 5462.69,4876 5490.87,4847.82 5490.87,4843.01 U1.92
P0MDIAP: RJ1.P2 U1.91 | length 1868
  Top Layer w5: RJ1.P2 4153.2,4103.75 4151.05,4110.94 4143.28,4115.12 4129.07,4129.34 4129.07,4218.73 4460.34,4550 5072.27,4550 5407.27,4885 5466.42,4885 5497.24,4854.18 5502.05,4854.18 U1.91
P0MDIBN: RJ1.P7 U1.94 | length 1959.4
  Top Layer w5: RJ1.P7 4384.8,4049.8 4355,4020 4305,4020 4285,4040 4285,4090 4240,4135 4240,4217.27 4522.73,4500 5095,4500 5434.57,4839.57 5454.57,4839.57 5468.6,4825.55 5468.6,4820.74 U1.94
P0MDIBP: RJ1.P4 U1.93 | length 1959.4
  Top Layer w5: RJ1.P4 4197.38,4062.38 4185,4050 4185,4020 4208.2,3996.8 4251.8,3996.8 4276,4021 4276,4086.27 4231,4131.27 4231,4221 4519,4509 5091.27,4509 5430.85,4848.57 5458.3,4848.57 5474.96,4831.91 5479.77,4831.91 U1.93
P0MDICN: RJ1.P6 U1.98 | length 1494.7
  Top Layer w5: RJ1.P6 4311.95,4103.48 4314.55,4110.51 4322.82,4114.33 4339,4130.51 4339,4196.27 4597.73,4455 5247.26,4455 5452.69,4660.44 5457.43,4660.44 U1.98
P0MDICP: RJ1.P5 U1.97 | length 1491.4
  Top Layer w5: RJ1.P5 4303.75,4121.28 4310.78,4118.69 4317.59,4121.83 4330,4134.23 4330,4200 4594,4464 5243.53,4464 5446.33,4666.8 5446.33,4671.54 U1.97
P0MDIDN: RJ1.P9 U1.101 | length 1422.8
  Top Layer w5: RJ1.P9 4462.5,4121.01 4455.32,4118.86 4439.1,4127.6 4439.1,4195 4462.72,4218.62 cw(c4468.38,4212.97) 4474.03,4218.62 ccw(c4479.69,4224.28) 4485.35,4218.62 ccw(c4479.69,4224.28) 4485.35,4229.94 cw(c4491.01,4235.59) 4485.35,4241.25 4654.1,4410 5269.08,4410 5486.07,4626.99 5490.87,4626.99 U1.101
P0MDIDP: RJ1.P8 U1.100 | length 1422
  Top Layer w5: RJ1.P8 4453.2,4103.75 4451.05,4110.94 4433.67,4120.3 4430.1,4123.87 4430.1,4198.73 4650.37,4419 5265.35,4419 5479.7,4633.35 5479.7,4638.16 U1.100
P1_LED0: C43.2 R38.1 R41.2 U1.79 | length 2238.6
  Top Layer w6: v2(5025,3880) v2(5025,3940) ; v2(5465,5150) 5490,5150 5600,5040 5600,5023.38 U1.79
  Bottom Layer w6: v2(5025,3880) 5025,3856.5 C43.2 5023.5,3810.54 R38.1 R41.2 ; v2(5025,3940) 5138.86,3940 5231.01,4032.15 5231.01,4294.56 5042.98,4482.59 5042.98,4997.41 5195.57,5150 v2(5465,5150)
P1_LED1: C45.2 R39.1 R40.1 U1.78 | length 2352.9
  Top Layer w6: v2(4945,3880) v2(4945,3960) ; v2(5480,5170) 5490,5170 5615,5045 5615,5030.72 U1.78
  Bottom Layer w6: R40.1 R39.1 4941.5,3810.54 C45.2 4945,3858.5 v2(4945,3880) ; v2(4945,3960) 5143.29,3960 5220,4036.71 5220,4290 5031.97,4478.03 5031.97,5001.97 5200,5170 v2(5480,5170)
P1MDIAN: RJ2.P3 U1.104 | length 1102
  Top Layer w5: RJ2.P3 4802.5,4121.01 4795.32,4118.86 4788.71,4122.42 4778.07,4133.07 4778.07,4195 4800.64,4217.58 cw(c4806.3,4211.92) 4811.96,4217.58 ccw(c4817.61,4223.23) 4823.27,4217.58 ccw(c4817.61,4223.23) 4823.27,4228.89 cw(c4828.93,4234.55) 4823.27,4240.21 4949.07,4366 5291.9,4366 5519.51,4593.61 5524.25,4593.61 U1.104
P1MDIAP: RJ2.P2 U1.103 | length 1101.3
  Top Layer w5: RJ2.P2 4793.2,4103.75 4791.05,4110.94 4783.28,4115.12 4769.07,4129.34 4769.07,4198.73 4945.34,4375 5288.17,4375 5513.15,4599.98 5513.15,4604.72 U1.103
P1MDIBN: RJ2.P7 U1.107 | length 1266.9
  Top Layer w5: RJ2.P7 5024.94,4162.24 5024.94,4049.44 4995.14,4019.64 4945.14,4019.64 4925.14,4039.64 4925.14,4092.59 4880,4137.73 4880,4190 5011,4321 5313.72,4321 5552.89,4560.17 5557.7,4560.17 U1.107
P1MDIBP: RJ2.P4 U1.106 | length 1267
  Top Layer w5: RJ2.P4 4870.54,4062.02 4837.52,4062.02 4825.14,4049.64 4825.14,4009.86 4843.4,3991.6 4896.6,3991.6 4916.14,4011.14 4916.14,4088.86 4871,4134 4871,4193.73 5007.27,4330 5309.99,4330 5546.52,4566.53 5546.52,4571.34 U1.106
P1MDICN: RJ2.P6 U1.110 | length 929.3
  Top Layer w5: RJ2.P6 4951.95,4103.48 4954.55,4110.51 4962.82,4114.33 4979,4130.51 4979,4190 5069,4280 5339.54,4280 5586.33,4526.79 5591.07,4526.79 U1.110
P1MDICP: RJ2.P5 U1.109 | length 926
  Top Layer w5: RJ2.P5 4943.75,4121.28 4950.78,4118.69 4957.59,4121.83 4970,4134.23 4970,4193.73 5065.27,4289 5335.81,4289 5579.97,4533.16 5579.97,4537.89 U1.109
P1MDIDN: RJ2.P9 U1.113 | length 859.8
  Top Layer w5: RJ2.P9 5102.5,4121.01 5095.32,4118.86 5079.1,4127.6 5079.1,4185 5103.09,4208.99 cw(c5108.75,4203.34) 5114.41,4208.99 5116.04,4207.36 ccw(c5121.7,4213.01) 5127.36,4207.36 ccw(c5121.7,4213.01) 5127.36,4218.67 5125.72,4220.31 cw(c5131.38,4225.97) 5125.72,4231.62 5134.1,4240 5366.36,4240 5619.71,4493.35 5624.52,4493.35 U1.113
P1MDIDP: RJ2.P8 U1.112 | length 854.5
  Top Layer w5: RJ2.P8 5093.2,4103.75 5091.05,4110.94 5073.67,4120.3 5070.1,4123.87 5070.1,4188.73 5130.37,4249 5362.64,4249 5613.35,4499.71 5613.35,4504.52 U1.112
P2_LED0: C46.2 R33.1 R36.2 U1.75 | length 5444.6
  Top Layer w6: v2(5480,5235) 5485,5235 5660,5060 5660,5052.47 U1.75 ; v2(7145,4685) 7145,4618.33 7190.99,4572.29 7190.99,4325.99 v2(7150,4285)
  Bottom Layer w6: v2(5480,5235) 5465,5235 5444,5256 5444,5318.42 5481.43,5355.85 6109.69,5355.85 6780.54,4685 v2(7145,4685) ; C46.2 5603.5,3910 5603.5,3868.54 R36.2 R33.1 5677.96,3867.04 5693.99,3851.01 5693.99,3745.44 5740.44,3698.99 6071.85,3698.99 6116.51,3743.65 6116.51,3890.94 6149.56,3923.99 6315.44,3923.99 6347.99,3891.44 6347.99,3736.74 6382.24,3702.49 6715.82,3702.49 6757.99,3744.66 6757.99,3897.42 6804.57,3944 7051.79,3944 7178.01,4070.22 7177.99,4242.01 7150,4270 v2(7150,4285)
P2_LED1: C47.2 R34.1 R35.1 U1.77 | length 5669.3
  Top Layer w6: v2(5469.8,5191.4) 5471.2,5190 5490,5190 5630,5050 5630,5037.92 U1.77 ; v2(7120,4705) 7120,4627.77 7170.96,4576.78 ; v2(7125,4280) 7125,4283.83 7179.99,4338.82 7179.99,4567.76 7170.94,4576.75
  Bottom Layer w6: v2(5469.8,5191.4) 5470,5191.6 5470,5214.43 5433,5251.43 5433,5322.97 5476.88,5366.85 6114.25,5366.85 6776.1,4705 v2(7120,4705) ; R34.1 R35.1 5550,3911.5 C47.2 5546.5,3931.5 5565,3950 5675,3950 5705,3920 5705,3750 5745,3710 6067.29,3710 6105.5,3748.21 6105.5,3895.5 6145,3935 6320,3935 6359,3896 6359,3741.31 6386.81,3713.5 6711.27,3713.5 6746.99,3749.22 6746.99,3901.99 6800,3955 7047.22,3955 7167,4074.78 7166.98,4228.02 7125,4270 v2(7125,4280)
P2MDIAN: RJ3.P3 U1.118 | length 546.8
  Top Layer w5: RJ3.P3 5442.5,4121.01 5435.32,4118.86 5428.71,4122.42 5415.57,4135.57 5415.57,4177.83 5454.05,4216.32 cw(c5459.71,4210.66) 5465.36,4216.32 ccw(c5471.02,4221.97) 5476.68,4216.32 ccw(c5471.02,4221.97) 5476.68,4227.63 cw(c5482.33,4233.29) 5476.68,4238.94 5675.43,4437.7 5680.17,4437.7 U1.118
P2MDIAP: RJ3.P2 U1.117 | length 546.1
  Top Layer w5: RJ3.P2 5433.2,4103.75 5431.05,4110.94 5423.28,4115.12 5406.57,4131.84 5406.57,4181.56 5669.07,4444.06 5669.07,4448.8 U1.117
P2MDIBN: RJ3.P7 U1.121 | length 731.7
  Top Layer w5: RJ3.P7 5664.8,4050.14 5635,4020.34 5585,4020.34 5565,4040.34 5565,4095 5520,4140 5520,4215 5703.5,4398.5 5703.5,4398.95 5708.81,4404.25 5713.61,4404.25 U1.121
P2MDIBP: RJ3.P4 U1.120 | length 731.7
  Top Layer w5: RJ3.P4 5510.56,4062.72 5477.38,4062.72 5465,4050.34 5465,4010 5480.6,3994.4 5539.4,3994.4 5556,4011 5556,4091.27 5511,4136.27 5511,4218.73 5694.5,4402.23 5694.5,4402.67 5702.44,4410.61 5702.44,4415.42 U1.120
P2MDICN: RJ3.P6 U1.124 | length 414.4
  Top Layer w5: RJ3.P6 5591.95,4103.48 5594.55,4110.51 5602.82,4114.33 5619,4130.51 5619,4247.69 5742.18,4370.87 5746.99,4370.87 U1.124
P2MDICP: RJ3.P5 U1.123 | length 411.2
  Top Layer w5: RJ3.P5 5583.75,4121.28 5590.78,4118.69 5597.59,4121.83 5610,4134.23 5610,4251.42 5735.82,4377.24 5735.82,4382.05 U1.123
P2MDIDN: RJ3.P9 U1.127 | length 358.6
  Top Layer w5: RJ3.P9 5742.5,4121.01 5735.32,4118.86 5728.71,4122.42 5720.57,4130.57 5720.57,4203.85 cw(c5728.07,4203.85) 5728.07,4211.35 ccw(c5728.07,4218.85) 5735.57,4218.85 ccw(c5728.07,4218.85) 5728.07,4226.35 cw(c5728.07,4233.85) 5720.57,4233.85 5720.57,4282.44 5775.63,4337.5 5780.36,4337.5 U1.127
P2MDIDP: RJ3.P8 U1.126 | length 359
  Top Layer w5: RJ3.P8 5733.2,4103.75 5731.05,4110.94 5723.28,4115.12 5711.57,4126.84 5711.57,4286.17 5769.26,4343.86 5769.26,4348.6 U1.126
P3_LED0: C48.2 R7.1 R32.2 U1.74 | length 4469.5
  Top Layer w6: v2(5470,5260) 5480,5260 5675,5065 5675,5059.82 U1.74 ; v2(7190,4665) 7190,4604.44 7212.99,4581.44 7212.99,4297.99 v2(7200,4285)
  Bottom Layer w6: v2(5470,5260) 5455,5275 5455,5313.86 5485.99,5344.85 6105.14,5344.85 6784.99,4665 v2(7190,4665) ; R32.2 R7.1 6296.5,3830.54 C48.2 6320,3875 6325.97,3869.03 6325.97,3727.62 6373.12,3680.47 6724.91,3680.47 6780,3735.56 6780,3888.29 6813.71,3922 7060.93,3922 7200.03,4061.1 7200.01,4260.56 7199.8,4260.56 v2(7200,4285)
P3_LED1: C49.2 R8.1 R9.1 U1.72 | length 4594.7
  Top Layer w6: v2(5500,5295) 5500,5279.36 U1.72 ; v2(7165,4645) 7165,4613.89 7178.99,4599.9 7201.99,4576.87 7201.99,4311.99 7175,4285 v2(7175,4280)
  Bottom Layer w6: v2(5500,5295) 5500,5309.5 5513.35,5322.85 6096.01,5322.85 6542.02,4876.84 6542.02,4749.11 6646.14,4645 v2(7165,4645) ; R9.1 R8.1 6153.5,3830.54 C49.2 6155,3876.5 6155,3900 6167.98,3912.98 6310.88,3912.98 6336.98,3886.88 6336.98,3732.18 6377.68,3691.48 6720.37,3691.48 6768.99,3740.1 6768.99,3892.85 6809.14,3933 7056.36,3933 7189.02,4065.66 7189,4256 7175,4270 v2(7175,4280)
P3MDIAN: RJ4.P3 U1.3 | length 375.5
  Top Layer w5: U1.3 5940.74,4348.6 5940.74,4343.86 6059,4225.6 6059,4130 6064.09,4124.91 6075.32,4118.86 6082.5,4121.01 RJ4.P3
P3MDIAP: RJ4.P2 U1.2 | length 378.1
  Top Layer w5: U1.2 5929.64,4337.5 5934.37,4337.5 6050,4221.87 6050,4126.27 6058.66,4117.61 6071.05,4110.94 6073.2,4103.75 RJ4.P2
P3MDIBN: RJ4.P7 U1.5 | length 715.7
  Top Layer w5: U1.5 5963.01,4370.87 5963.01,4366.14 6100.15,4229 6131,4229 6159,4201 6159,4138.73 6205,4092.73 6205,4039.98 6225,4019.98 6275,4019.98 6304.8,4049.78 RJ4.P7
P3MDIBP: RJ4.P4 U1.4 | length 715.7
  Top Layer w5: U1.4 5951.91,4359.77 5956.65,4359.77 6096.42,4220 6127.27,4220 6150,4197.27 6150,4135 6196,4089 6196,4001 6184,3989 6116,3989 6105,4000 6105,4049.98 6117.38,4062.36 RJ4.P4
P3MDICN: RJ4.P6 U1.8 | length 536.9
  Top Layer w5: U1.8 5996.39,4404.25 5996.39,4399.51 6131.9,4264 6193.73,4264 6259,4198.73 6259,4131.27 6246.59,4118.87 6246.59,4118.1 6242.82,4114.33 6234.55,4110.51 6231.95,4103.48 RJ4.P6
P3MDICP: RJ4.P5 U1.7 | length 537.1
  Top Layer w5: U1.7 5985.28,4393.15 5990.02,4393.15 6128.17,4255 6190,4255 6199.78,4245.22 cw(c6194.12,4239.56) 6199.78,4233.91 ccw(c6205.44,4228.25) 6199.78,4222.59 ccw(c6205.44,4228.25) 6211.09,4222.59 cw(c6216.75,4216.94) 6222.41,4222.59 6250,4195 6250,4135 6237.59,4122.59 6237.59,4121.83 6230.78,4118.69 6223.75,4121.28 RJ4.P5
P3MDIDN: RJ4.P9 U1.10 | length 606.5
  Top Layer w5: U1.10 6018.66,4426.52 6018.66,4421.79 6146.45,4294 6249.73,4294 6360,4183.73 6360,4127.52 6360.88,4126.64 6375.32,4118.86 6382.5,4121.01 RJ4.P9
P3MDIDP: RJ4.P8 U1.9 | length 609.1
  Top Layer w5: U1.9 6007.56,4415.42 6012.3,4415.42 6142.72,4285 6246,4285 6351,4180 6351,4123.79 6355.45,4119.34 6371.05,4110.94 6373.2,4103.75 RJ4.P8
P4_LED0: C50.2 R28.1 R31.2 U1.70 | length 3391.5
  Top Layer w6: v2(5545,5295) 5545,5278.91 U1.70 ; v2(7235,4605) 7235,4300 v2(7250,4285)
  Bottom Layer w6: v2(5545,5295) 5550.84,5300.84 6086.88,5300.84 6520,4867.72 6520,4739.99 6655,4605 v2(7235,4605) ; R28.1 R31.2 6975,3861.5 C50.2 6971.5,3886.5 6985,3900 7070.07,3900 7217.28,4047.21 7219.47,4048.11 7220.37,4050.3 7222.05,4051.98 7222.05,4054.35 7222.96,4056.54 7222.05,4058.73 7222.03,4247.03 7250,4275 v2(7250,4285)
P4_LED1: C51.2 R29.1 R30.1 U1.71 | length 3563.7
  Top Layer w6: v2(5522.8,5304.9) 5523.15,5305.25 5523.15,5278.42 U1.71 ; v2(7215,4625) 7215,4595 7223.99,4586.01 7223.99,4281.01 v2(7225,4280)
  Bottom Layer w6: v2(5522.8,5304.9) 5529.75,5311.85 6091.44,5311.85 6531.01,4872.28 6531.01,4744.55 6650.58,4625 v2(7215,4625) ; R29.1 R30.1 6823.5,3815.54 C51.2 6823.5,3888.5 6846,3911 7065.5,3911 7211.04,4056.54 7211.02,4265.12 7211,4266 v2(7225,4280)
P4MDIAN: RJ5.P3 U1.23 | length 863.2
  Top Layer w5: U1.23 6163.48,4571.34 6163.48,4566.53 6461.01,4269 6619.73,4269 6700,4188.73 6700,4131.13 6708.71,4122.42 6715.32,4118.86 6722.5,4121.01 RJ5.P3
P4MDIAP: RJ5.P2 U1.22 | length 865.8
  Top Layer w5: U1.22 6152.3,4560.17 6157.11,4560.17 6457.28,4260 6616,4260 6691,4185 6691,4127.4 6703.28,4115.12 6711.05,4110.94 6713.2,4103.75 RJ5.P2
P4MDIBN: RJ5.P7 U1.26 | length 1220
  Top Layer w5: U1.26 6196.85,4604.72 6196.85,4599.98 6481.83,4315 6687.73,4315 6799,4203.73 6799,4136 6844,4091 6844,4040.13 6864,4020.13 6914,4020.13 6944.8,4050.93 RJ5.P7
P4MDIBP: RJ5.P4 U1.25 | length 1220
  Top Layer w5: U1.25 6185.75,4593.61 6190.49,4593.61 6478.1,4306 6684,4306 6790,4200 6790,4132.27 6835,4087.27 6835,4005 6813.3,3983.3 6766.7,3983.3 6744,4006 6744,4050.13 6756.38,4062.51 6790.77,4062.51 RJ5.P4
P4MDICN: RJ5.P6 U1.29 | length 1039.6
  Top Layer w5: U1.29 6230.3,4638.16 6230.3,4633.35 6509.65,4354 6738.73,4354 6899,4193.73 6899,4124.34 6894.26,4119.6 6874.55,4110.51 6871.95,4103.48 RJ5.P6
P4MDICP: RJ5.P5 U1.28 | length 1039.7
  Top Layer w5: U1.28 6219.13,4626.99 6223.93,4626.99 6505.92,4345 6735,4345 6842.59,4237.41 cw(c6836.94,4231.75) 6842.59,4226.09 ccw(c6848.25,4220.44) 6842.59,4214.78 ccw(c6848.25,4220.44) 6853.91,4214.78 cw(c6859.56,4209.12) 6865.22,4214.78 6890,4190 6890,4128.07 6889.03,4127.1 6870.78,4118.69 6863.75,4121.28 RJ5.P5
P4MDIDN: RJ5.P9 U1.31 | length 1111.5
  Top Layer w5: U1.31 6252.57,4660.44 6252.57,4655.63 6524.2,4384 6803.73,4384 7000,4187.73 7000,4128.48 7002.97,4125.51 7015.32,4118.86 7022.5,4121.01 RJ5.P9
P4MDIDP: RJ5.P8 U1.30 | length 1114.1
  Top Layer w5: U1.30 6241.4,4649.26 6246.21,4649.26 6520.47,4375 6800,4375 6991,4184 6991,4124.75 6997.54,4118.22 7011.05,4110.94 7013.2,4103.75 RJ5.P8
RESET: C42.1 R37.2 R47.1 R48.1 R48.2 RESET1.2 U1.47 | length 1273.8
  Top Layer w6: U1.47 6118.38,4965 6155,4965 6329,5139 6456,5139 v2(6500,5095) ; R47.1 6720,5255 6787.51,5187.49 6830,5187.49 ; v2(6755,5095) 6782.96,5095 R48.1 ; R37.2 6830,5150 6830,5187.49 ; R48.2 6830,5107.96 6830,5141.46 C42.1 ; RESET1.2 6830,5187.49
  Bottom Layer w6: v2(6500,5095) 6750,5095 v2(6755,5095)
RXD: H1.3 R20.2 R47.2 U1.45 | length 849.9
  Top Layer w6: U1.45 6132.92,4935 6160,4935 6325,5100 v2(6445,5100) ; H1.3 6537.04,5332.96 R20.2 R47.2
  Bottom Layer w6: v2(6445,5100) 6450,5100 6535,5185 H1.3
SCK: U1.87
SDA: U1.88
SPI_CLK: U1.48 U5.6 | length 865
  Top Layer w6: U1.48 6111.17,4980 6150,4980 6325,5155 6485,5155 6675,4965 U5.6
SPI_CS: U1.54 U5.1 | length 1348.7
  Top Layer w6: U1.54 6197.53,5200 6500,5200 6635,5065 6925,5065 6950,5040 6950,4890 6975,4865 U5.1
SPI_D0: U1.49 U5.5 | length 863.3
  Top Layer w6: U1.49 6103.83,4995 6145,4995 6320,5170 6490,5170 6645,5015 U5.5
SPI_D1: U1.53 U5.2 | length 1291.5
  Top Layer w6: U1.53 6204.73,5185 6495,5185 6630,5050 6885,5050 6900,5035 v2(6900,4915) ; v2(6990,4915) U5.2
  Bottom Layer w6: v2(6900,4915) v2(6990,4915)
TXD: H1.2 R21.1 U1.46 | length 712.7
  Top Layer w6: U1.46 6125.72,4950 6159.44,4950 6329.44,5120 v2(6425,5120) ; H1.2 6437.04,5332.96 R21.1
  Bottom Layer w6: v2(6425,5120) 6425,5325 H1.2
VBUS: C1.2 U4.1 U4.4 USB1.A9 USB1.B9 | length 239.7
  Top Layer w10: v2(3750,4115) 3763,4115 U4.4@3775,4115 ; U4.1 3874.6,4215.4 v2(3875,4215)
  Bottom Layer w10: v2(3750,4115) 3810,4115 3875,4180 v2(3875,4215)
XTALI: C5.2 U1.84 X2.1 | length 417.9
  Top Layer w6: X2.1 5354.41,5122.69 5377.11,5100 5412.08,5100 U1.84
  Top Layer w7.9: C5.2 5305.2,5089.8 5343.1,5127.69 X2.1
XTALO: C4.1 U1.83 X2.3 | length 502.9
  Top Layer w6: X2.3 5360.59,5222.31 5345,5206.72 5345,5189.28 U1.83
  Top Layer w7.9: X2.3 5371.9,5222.31 5414.8,5265.2 C4.1
"": RST1.2 RST1.4 U1.15 U1.16 U1.19 U1.35 U1.36 U1.38 U1.39

## Polygon pours and split planes (outlines as drawn)
GND on Bottom Layer (solid, remove dead copper, pour order 0): 3000,3000 8310,3000 8310,5720 3000,5720
3V3 on Top Layer (solid, remove dead copper, pour order 2): 3835,3995 3965,3995 3965,4030 3835,4030
3V3 on Top Layer (solid, remove dead copper, pour order 6): 3695,4346.03 3895,4346.03 3895,4395 3695,4395
$1N5420 on Top Layer (solid, remove dead copper, pour order 1): 3930,4040 3930,4149.99 3929.99,4150 3837.15,4150 3837.15,4042.15 3840,4040
VBUS on Top Layer (solid, remove dead copper, pour order 3): 3580,4150 3785,4150 3790,4145 3790,3990 3820,3960 3880,3960 3980,3860 3980,3450 3940,3410 3550,3410 3575,3435 3575,4150
GND on Top Layer (solid, remove dead copper, pour order 4): 3590,4155 3930,4155 3930,4185 3925,4185 3835,4185 3830,4190 3830,4269.09 3844.15,4283.24 3844.15,4320.85 3840,4325 3800,4325 3795,4320 3795,4266.9 3795,4265 3795,4190 3790,4185 3721.3,4185 3718.17,4188.14 3598.14,4188.14 3590,4180 3590,4157.14
$1N5419 on Top Layer (solid, remove dead copper, pour order 5): 3695,4315 3785,4315 3785,4190 3760,4190 3695,4255
GND on Top Layer (solid, remove dead copper, pour order 7): 6845,4420 6555,4420 6290,4675 6235,4730 5855,4350 5467.1,4738.2 5550,4820 5440,4930 5375,4930 5160,4720 5040,4600 4440,4600 4075,4235 3995,4235 3995,3250 4000,3245 4000,3235 4005,3230 4000.52,3230 4000.31,3229.79 3994.9,3235.2 3347.63,3235.2 3347.63,5177.63 3655,5485 7535,5485 7635,5385 7635,4540 7425,4330 7425,3275 7185,3275 7185,4110 6875,4420

## Keep-outs
Board Outline Layer:
  lines w10 net "": 3615,3605.39 3615,5295 cw(c3715,5295) 3715,5395 7215.79,5395 cw(c7215.79,5295) 7315.79,5295 7315.79,3605.39 cw(c7215.79,3605.39) 7215.79,3505.39 3715,3505.39 cw(c3715,3605.39) 3615,3605.39

## Silkscreen, mask and mechanical layers (free items; w line width, h text height)
Top Silkscreen Layer:
  region net "": 3940,5035 4020,5035 4020,5350 3940,5350
  region net "": 5145,5035 5200,5035 5200,5350 5145,5350
  lines w3 net "": 6375,5225 6735,5225 6735,5280 6375,5280 6375,5225 ; 6523.41,4529 7030,4529 7030,4700 6523.41,4700 6523.41,4529
  lines w5 net "": 3940,4740 3950,4740 ; 3940,5035 5205,5035
  lines w6 net "": 6395,5080 6395,5180 ; 6525,5080 6525,5180 ; 6320,5080 6655,5080 6655,5180 6320,5180 6320,5080
  lines w10 net "": 3940,4745 5195,4745 5195,5350 3940,5350 3940,4745
  text "NC" at 6683.92,5243.88 h25.96
  text "G" at 6335,5102.57 h52.3
  text "TX" at 6412.85,5102.76 h51.92
  text "RX" at 6547.85,5102.76 h51.92
  text "5-Port Gigabit Ethernetet /   Smart Managed Switch" at 3983.22,5064.33 h102.97
  text "5-Port Left -->Right" at 4158.94,4906.72 h90.62
  text "JLCJLCJLCJLC" at 5626.29,4798.32 h38.94
  text "1  2  3  4  5" at 4187.77,4787.76 h51.92
  text "Enable LED Light when" at 6542.26,4663.88 h25.96
  text "1" at 6540,4643.79 h26.15
  text "Power On or Reset" at 6546.82,4623.88 h25.96
  text "Disable LED Light when" at 6541.12,4578.88 h25.96
  text "0" at 6535,4558.79 h26.15
  text "Power On or Reset" at 6546.82,4538.88 h25.96
  text "DC 5V" at 4370.62,4378.81 h101.95
Mech6:
  lines w10 net "": 3615,5155 3851.22,5155 ; 3855,5158.78 3855,5395 ; 7075,5158.78 7075,5395 ; 7078.78,5155 7315,5155 ; 3615,3385.39 7315.79,3385.39 7315.79,5395 3615,5395 3615,3385.39